# Altium PCB PCB4.PcbDoc
Units mm, origin at the board's own origin, x right, y up, seen from the top; angles counter-clockwise.
Board outline 200 x 100 mm, 2 copper layers (Top Layer, Bottom Layer); 133 components, 113 nets, 472 pads, 30 vias.
Unrouted connection lines stored in the file: 95.
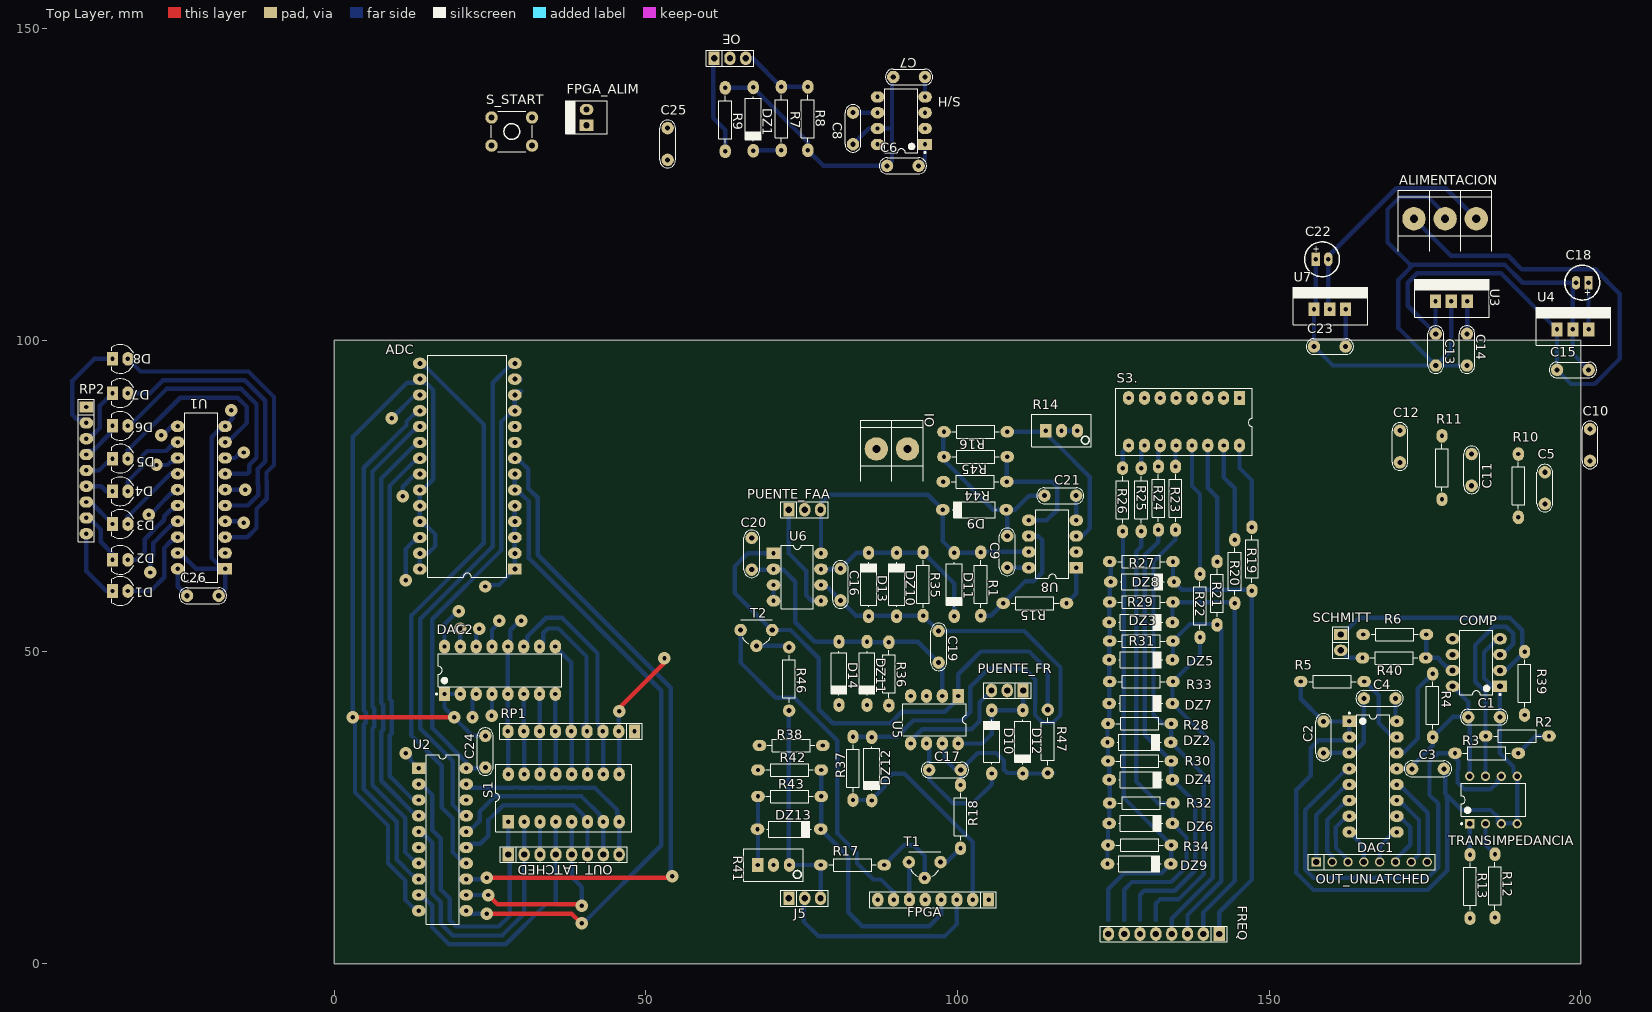
[diagram p0: Top Layer view]
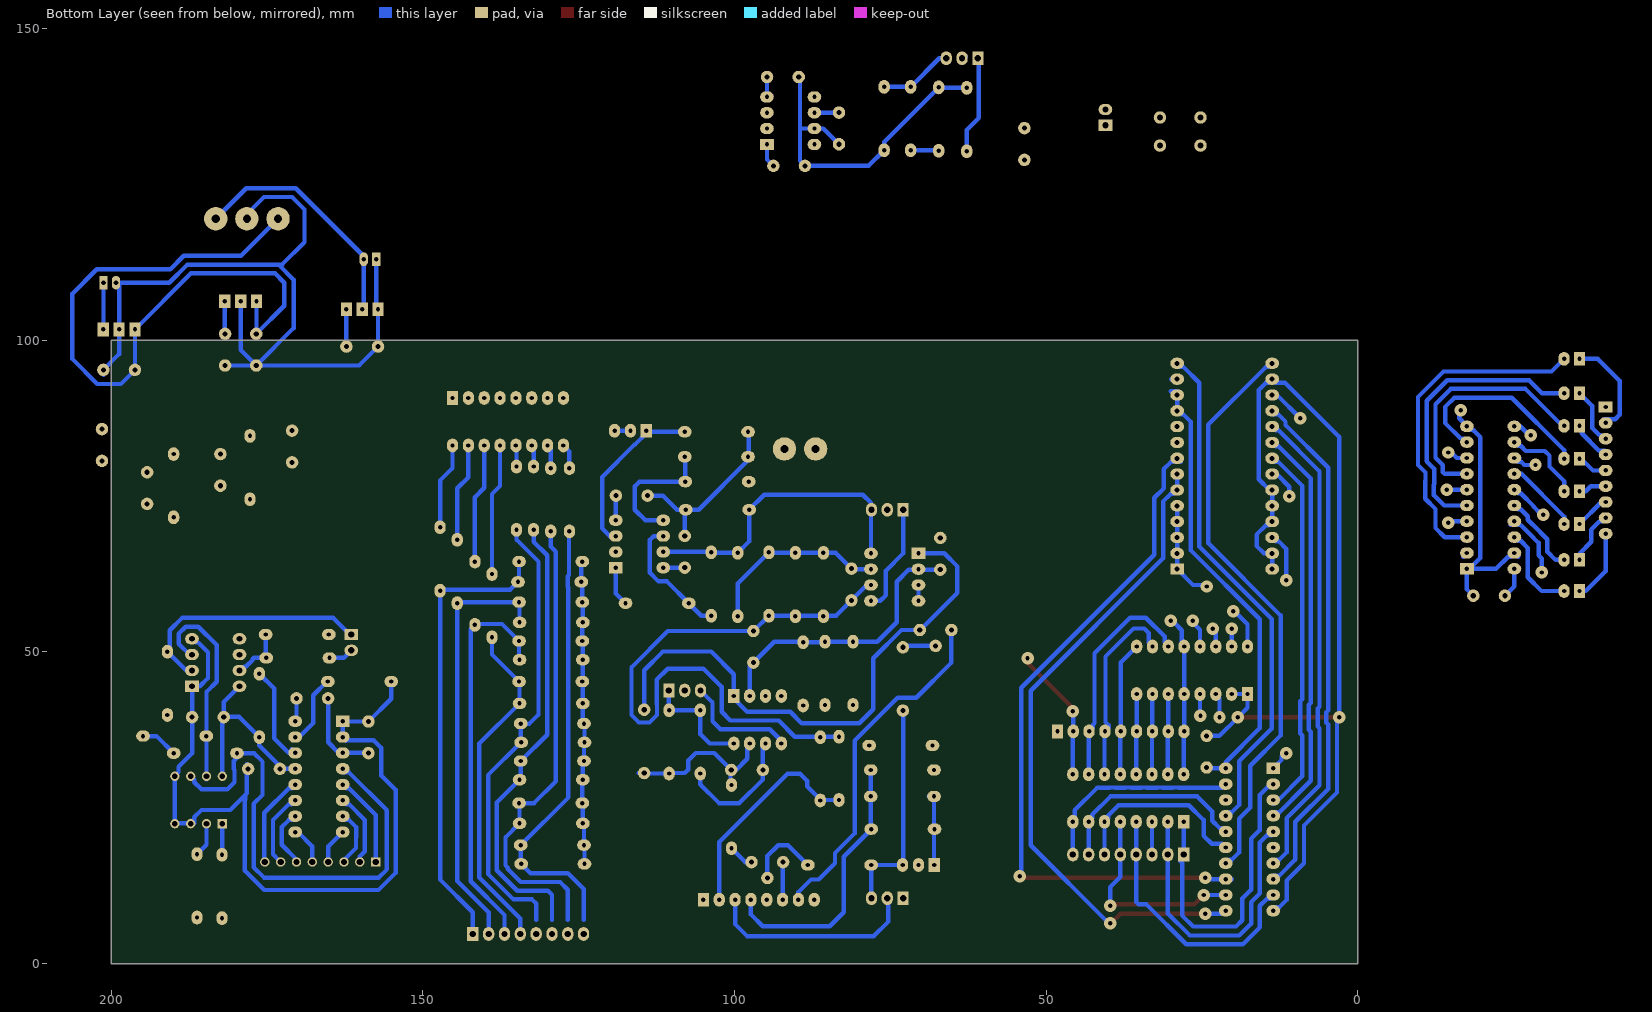
[diagram p1: Bottom Layer view, seen from below]

## Layer stack, top to bottom
Top Solder: solder mask 0.0102, Solder Resist, Dk 3.5
Top Layer: signal copper 0.0356
Dielectric 1: dielectric 0.32, FR-4, Dk 4.8
Bottom Layer: signal copper 0.0356
Bottom Solder: solder mask 0.0102, Solder Resist, Dk 3.5

## Board outline
0,0 0,100 200,100 200,0 0,0

## Design rules (kind name [scope] priority, off if disabled: settings)
Clearance [All] p1: gap=0.7 ignorepadtopadclearanceinfootprint=FALSE except(0: Arc-Hole Track-Hole SMDPad-Hole THPad-Hole Via-Hole Fill-Hole Poly-Hole Region-Hole Text-Hole)
PolygonConnect [All] p1: connectstyle=Relief reliefconductorwidth=0.254 reliefentries=4 polygonreliefangle="90 Angle" airgapwidth=0.254
RoutingVias [All] p1: holewidth=0.7 width=2 viastyle="Through Hole" minholewidth=0.7 minwidth=2 maxholewidth=0.7 maxwidth=2
SolderMaskExpansion [All] p1: expansion=0.102
Width [All] p1: maxlimit=0.7 minlimit=0.7 preferedwidth=0.7
30 further rules are at their usual default settings.

## Components (designator, comment, footprint, x,y, rotation, side; value= is the part's Value field where it differs from the comment)
ADC "ADC0808CCN" DIP28 28.99,63.29 r180 top
ALIMENTACION "BORNERA 3" BORNERA3 178.25,119.5 r270 top
C1 "100n" CAP200 184.5,39.55 r0 top
C2 "100n" CAP200 158.75,36.3 r270 top
C3 "100n" CAP200 175.5,31.25 r180 top
C4 "10n" CAP200 167.75,42.55 r0 top
C5 "100n" CAP200 194.25,76.29 r270 top
C6 "100n" CAP200 91.25,128 r180 top
C7 "100n" CAP200 92.25,142.25 r180 top
C8 "10n" CAP200 83.25,134 r270 top
C9 "CAP" CAP200 108,66.07 r90 top
C10 "10n" CAP200 201.5,83.21 r90 top
C11 "100n" CAP200 182.5,79.21 r270 top
C12 "100n" CAP200 171,82.96 r270 top
C13 "330n" CAP200 176.75,98.5 r270 top
C14 "100n" CAP200 181.75,98.5 r270 top
C15 "100n" CAP200 198.75,95.25 r0 top
C16 "100n" CAP200 81.25,60.82 r270 top
C17 "100n" CAP200 98,31.07 r0 top
C18 "10u" CAP100RP 200.25,109.25 r180 top
C19 "100n" CAP200 97,50.82 r90 top
C20 "100n" CAP200 67,65.75 r90 top
C21 "CAP" CAP200 116.5,75.07 r180 top
C22 "2.2u" CAP100RP 158.5,113 r0 top
C23 "1u" CAP200 159.75,99 r180 top
C24 "100n" CAP200 24.25,34 r90 top
C25 "CAP" CAP200 53.5,131.5 r270 top
C26 "CAP" CAP200 -21.06,59.02 r0 top
COMP "LM311N" N08E#1 183.25,48.3 r180 top
D1 "LED" LED3 -34.31,59.77 r180 top
D2 "LED" LED3 -34.31,64.77 r180 top
D3 "LED" LED3 -34.31,70.52 r180 top
D4 "LED" LED3 -34.31,75.77 r180 top
D5 "LED" LED3 -34.31,81.02 r180 top
D6 "LED" LED3 -34.31,86.27 r180 top
D7 "LED" LED3 -34.31,91.52 r180 top
D8 "LED" LED3 -34.31,97.02 r180 top
D9 "DIODO" DO41 102.75,72.82 r180 top
D10 "DIODO" DO41 105.5,35.57 r90 top
D11 "DIODO" DO41 99.5,60.82 r270 top
D12 "DIODO" DO41 110.5,35.57 r270 top
D13 "DIODO" DO41 85.75,60.82 r90 top
D14 "DIODO" DO41 81,46.57 r270 top
DAC1 "DAC0800LCN" N16E 166.69,29.99 r0 top
DAC2 "DAC0800LCN" N16E 26.6,47.06 r90 top
DZ1 "3.3V" DO41 67.25,135.5 r270 top
DZ2 "3.6V" DO41 129.17,35.5 r0 top
DZ3 "3.6V" DO41 129.42,54.75 r0 top
DZ4 "3.6V" DO41 129.42,29.5 r0 top
DZ5 "3.6V" DO41 129.42,48.75 r0 top
DZ6 "3.6V" DO41 129.42,22.5 r0 top
DZ7 "3.6V" DO41 129.42,41.75 r0 top
DZ8 "3.6V" DO41 129.67,61.25 r0 top
DZ9 "3.6V" DO41 129.17,16 r0 top
DZ10 "5.6V" DO41 90.25,60.82 r90 top
DZ11 "5.6V" DO41 85.5,46.57 r270 top
DZ12 "3.6V" DO41 86.25,31.25 r270 top
DZ13 "3.6V" DO41 73,21.57 r0 top
FPGA "CON8" SIP8#1 105,10.25 r180 top
FPGA_ALIM "MOLEX2" MOLEX2 40.5,134.5 r90 top
FREQ "CON8" SIP8#2 142,4.75 r180 top
IO "BORNERA 2" BORNERA2 89.5,82.57 r270 top
J5 "SAR/MOD" JUMPER3 75.5,10.5 r0 top
OE "JUMPER" JUMPER3 63.5,145.25 r0 top
OUT_LATCHED "CON8" SIP8#2 27.95,17.5 r0 top
OUT_UNLATCHED "CON8" SIP8#3 157.59,16.3 r0 top
PUENTE_FAA "JUMPER" JUMPER3 75.5,72.82 r0 top
PUENTE_FR "JUMPER" JUMPER3 108,43.82 r180 top
R1 "4k7" RES400#1 103.75,55.82 r90 top
R2 "1K5" RES400#1 184.75,36.5 r0 top
R3 "1K" RES400#1 190,33.75 r180 top
R4 "5K" RES400#1 176.25,46.5 r270 top
R5 "5K" RES400#1 165.25,45.25 r180 top
R6 "1K" RES400#1 175.25,52.8 r180 top
R7 "560" RES400#1 71.75,130.5 r90 top
R8 "1K" RES400#1 76,130.5 r90 top
R9 "1K" RES400#1 62.75,140.5 r270 top
R10 "5K" RES400#1 190,81.75 r270 top
R11 "5K" RES400#1 177.75,84.66 r270 top
R12 "1K" RES400#1 186.25,17.55 r270 top
R13 "1k5" RES400#1 182.25,7.3 r90 top
R14 "10k" "PRESET V" 116.71,85.5 r0 top
R15 "4k7" RES400#1 117.5,57.82 r180 top
R16 "4k7" RES400#1 108,85.32 r180 top
R17 "2k2" RES400#1 88.25,15.82 r180 top
R18 "6k8" RES400#1 100.5,18.5 r90 top
R19 "10k" RES400#1 147.25,70 r270 top
R20 "10k" RES400#1 144.5,68 r270 top
R21 "10k" RES400#1 141.67,64.5 r270 top
R22 "10k" RES400#1 138.92,62.5 r270 top
R23 "10k" RES400#1 135,79.75 r270 top
R24 "10k" RES400#1 132.25,79.75 r270 top
R25 "10k" RES400#1 129.5,79.5 r270 top
R26 "10k" RES400#1 126.5,79.5 r270 top
R27 "22k" RES400#1 124.42,64.5 r0 top
R28 "22k" RES400#1 124.17,38.5 r0 top
R29 "22k" RES400#1 124.42,58 r0 top
R30 "22k" RES400#1 124.17,32.5 r0 top
R31 "22k" RES400#1 124.42,51.75 r0 top
R32 "22k" RES400#1 124.42,25.75 r0 top
R33 "22k" RES400#1 124.42,45.25 r0 top
R34 "22k" RES400#1 124.17,19 r0 top
R35 "10k" RES400#1 94.5,55.82 r90 top
R36 "10k" RES400#1 89,41.41 r90 top
R37 "20k" RES400#1 83.25,26.25 r90 top
R38 "10k" RES400#1 68.25,35 r0 top
R39 "TBD" RES400#1 191,39.89 r90 top
R40 "TBD" RES400#1 165,49.05 r0 top
R41 "PRESET" "PRESET V" 70.5,15.82 r0 top
R42 "10K" RES400#1 68,31.07 r0 top
R43 "20K" RES400#1 68,26.82 r0 top
R44 "4k7" RES400#1 97.75,77.32 r0 top
R45 "4k7" RES400#1 108,81.32 r180 top
R46 "2k2" RES400#2 73,50.75 r270 top
R47 "6k8" RES400#2 114.5,30.57 r90 top
RP1 "R-PACK 8+1" RESNET8+1 48.2,37.25 r180 top
RP2 "R-PACK 8+1" RESNET8+1 -39.75,89.29 r270 top
S1 "SW-DIP8" DIP-16-KEY 27.95,22.75 r0 top
S3. "SW-DIP8" DIP-16-KEY 145.25,90.75 r180 top
S/H "LF398N" N08E#2 91,135.25 r180 top
S_START "TACT SWITCH" TACTSWITCH 28.5,133.5 r90 top
SCHMITT "JUMPER" JUMPER2 161.5,51.53 r270 top
T1 "TRANSISTOR NPN" TO92 94.75,15 r0 top
T2 "TRANSISTOR NPN" TO92 67.75,52.25 r0 top
TRANSIMPEDANCIA "LM358N" N08E#3 186,26.25 r90 top
U1 "SN74LS244N" 738-03 -21.31,74.77 r90 top
U2 "MC74HC374N" 738-03 17.39,19.9 r270 top
U3 "7805" "TO-220 V" 179.25,106.25 r0 top
U4 "MC33269" "TO-220 V" 198.75,101.75 r0 top
U5 "MAX297CPA" DIP8 100.12,42.94 r270 top
U6 "MAX297CPA" DIP8 70.5,65.82 r0 top
U7 "7905" "TO-220 V" 159.75,105 r0 top
U8 "TL082ACJG" 693-02 115.25,67.32 r90 top

## Footprints (in the part's own frame and the unit in brackets; to place one, negate y for a bottom-side part, rotate by r counter-clockwise, add the part's x,y. Pads: shape width x height; smd on the part's side, far side on the other; paste and mask are expansions set on the pad)
693-02 [mm] "DIP; 8 Leads; Row Spacing 7.62 mm; Pitch 2.54 mm"
  rect 1.8x2.2 hole 0.7: 1(-3.81,-3.81)
  oval 1.8x2.2 hole 0.7: 2(-1.27,-3.81) 3(1.27,-3.81) 4(3.81,-3.81) 5(3.81,3.81) 6(1.27,3.81) 7(-1.27,3.81) 8(-3.81,3.81)
  silkscreen extent -5.5,-2.65 5.5,2.65
738-03 [mm] "DIP; 20 Leads; Row Spacing 7.62 mm; Pitch 2.54 mm"
  rect 1.8x2.2 hole 0.7: 1(-11.43,-3.81)
  oval 1.8x2.2 hole 0.7: 2(-8.89,-3.81) 3(-6.35,-3.81) 4(-3.81,-3.81) 5(-1.27,-3.81) 6(1.27,-3.81) 7(3.81,-3.81) 8(6.35,-3.81) 9(8.89,-3.81) 10(11.43,-3.81) 11(11.43,3.81) 12(8.89,3.81) 13(6.35,3.81) 14(3.81,3.81) 15(1.27,3.81) 16(-1.27,3.81) 17(-3.81,3.81) 18(-6.35,3.81) 19(-8.89,3.81) 20(-11.43,3.81)
  silkscreen extent -13.6,-2.65 13.6,2.65
BORNERA2 [mm] "Bornera con Tornillos 5mm separación"
  round 3.75 hole 1.3: 1(0,2.5) 2(0,-2.5)
  silkscreen extent -4.6,-5 5.2,5, body extent -3.76,-4.89 3.94,5.61, height 10
BORNERA3 [mm] "Bornera con Tornillos 5mm separación"
  round 3.75 hole 1.3: 1(0,5) 2(0,0) 3(0,-5)
  silkscreen extent -4.6,-7.5 5.2,7.5, body extent -3.76,-7.39 3.94,8.11, height 10.05
CAP100RP [mm] "Body diameter 5mm"
  rect 1.3x2.2 hole 0.762: 1(-1,0)
  oval 1.3x2.2 hole 0.762: 2(1,0)
  silkscreen extent -2.79,-2.79 2.79,2.79, body extent -2.53,-2.51 2.53,2.54, height 11.53
CAP200 [mm]
  round 2 hole 0.813: 1(-2.54,0) 2(2.54,0)
  silkscreen extent -3.81,-1.27 3.81,1.27, body extent -2.79,-1.17 2.79,1.12, height 6.24
DIP8 [mm]
  rect 2.2x1.8 hole 0.7: 1(0,0)
  oval 2.2x1.8 hole 0.7: 2(0,-2.54) 3(0,-5.08) 4(0,-7.62) 5(7.62,-7.62) 6(7.62,-5.08) 7(7.62,-2.54) 8(7.62,0)
  silkscreen extent 1.27,-8.89 6.35,1.27, body extent -0.06,-9.21 7.7,1.59, height 4.5
DIP28 [mm]
  rect 2.2x1.8 hole 0.813: 1(0,0)
  oval 2.2x1.8 hole 0.813: 2(0,-2.54) 3(0,-5.08) 4(0,-7.62) 5(0,-10.16) 6(0,-12.7) 7(0,-15.24) 8(0,-17.78) 9(0,-20.32) 10(0,-22.86) 11(0,-25.4) 12(0,-27.94) 13(0,-30.48) 14(0,-33.02) 15(15.24,-33.02) 16(15.24,-30.48) 17(15.24,-27.94) 18(15.24,-25.4) 19(15.24,-22.86) 20(15.24,-20.32) 21(15.24,-17.78) 22(15.24,-15.24) 23(15.24,-12.7) 24(15.24,-10.16) 25(15.24,-7.62) 26(15.24,-5.08) 27(15.24,-2.54) 28(15.24,0)
  silkscreen extent 1.27,-34.29 13.97,1.27, body extent -0.19,-34.54 15.43,1.47, height 4.66
DIP-16-KEY [mm] "DIP; 16 Leads; Row Spacing 7.62 mm; Pitch 2.54 mm"
  rect 1.8x2.2 hole 0.7: 1(0,0)
  oval 1.8x2.2 hole 0.7: 2(2.54,0) 3(5.08,0) 4(7.62,0) 5(10.16,0) 6(12.7,0) 7(15.24,0) 8(17.78,0) 9(17.78,7.62) 10(15.24,7.62) 11(12.7,7.62) 12(10.16,7.62) 13(7.62,7.62) 14(5.08,7.62) 15(2.54,7.62) 16(0,7.62)
  silkscreen extent -2.05,-1.59 19.83,9.2
DO41 [mm]
  oval 2.2x1.8 hole 0.7: 1(-5.08,0) 2(5.08,0)
  silkscreen extent -3.56,-1.27 3.56,1.27, body extent -5.46,-1.19 5.46,1.37, height 2.03
JUMPER2 [mm]
  rect 1.8x2.2 hole 1.016: 1(-1.27,0)
  oval 1.8x2.2 hole 1.016: 2(1.27,0)
  silkscreen extent -2.54,-1.27 2.54,1.27, body extent -2.46,-1.27 2.54,1.27, height 9.5
JUMPER3 [mm]
  rect 1.8x2.2 hole 1.016: 1(-2.54,0)
  oval 1.8x2.2 hole 1.016: 2(0,0) 3(2.54,0)
  silkscreen extent -3.81,-1.27 3.81,1.27, body extent -3.81,-1.3 3.81,1.27, height 16.15
LED3 [mm]
  oval 1.8x2.2 hole 0.7: 1(-1.219,0)
  rect 1.7x2.2 hole 0.7: 2(1.245,0)
  silkscreen extent -2.13,-2.3 1.36,2.3, body extent -1.65,-1.63 1.65,1.66, height 0.49
MOLEX2 [mm]
  rect 1.8x2.2 hole 1.016: 1(0,0)
  oval 1.8x2.2 hole 1.016: 2(2.54,0)
  silkscreen extent -1.4,-3.3 3.94,3.3, body extent -1.27,-3.17 3.81,3.18, height 10.74
N08E#1 [mm] "DIP, 8-Leads, Row Spacing 7.62mm, Pitch 2.54mm, Body 9.91x6.35mm"
  rect 2.2x1.8 hole 0.9: 1(-3.81,3.81)
  oval 2.2x1.8 hole 0.9: 2(-3.81,1.27) 3(-3.81,-1.27) 4(-3.81,-3.81) 5(3.81,-3.81) 6(3.81,-1.27) 7(3.81,1.27) 8(3.81,3.81)
  silkscreen extent -3.94,-5.15 2.65,5.23, body extent -3.6,-5.15 3.6,5.15, height 5.34
N08E#2 [mm] "DIP, 8-Leads, Row Spacing 7.62mm, Pitch 2.54mm, Body 9.91x6.35mm"
  rect 2.2x1.8 hole 0.7: 1(-3.81,3.81)
  oval 2.2x1.8 hole 0.7: 2(-3.81,1.27) 3(-3.81,-1.27) 4(-3.81,-3.81) 5(3.81,-3.81) 6(3.81,-1.27) 7(3.81,1.27) 8(3.81,3.81)
  silkscreen extent -3.94,-5.15 2.65,5.23, body extent -3.6,-5.15 3.6,5.15, height 5.34
N08E#3 [mm] "DIP, 8-Leads, Row Spacing 7.62mm, Pitch 2.54mm, Body 9.91x6.35mm"
  rect 1.5x1.5 hole 0.9: 1(-3.81,3.81)
  round 1.5 hole 0.9: 2(-3.81,1.27) 3(-3.81,-1.27) 4(-3.81,-3.81) 5(3.81,-3.81) 6(3.81,-1.27) 7(3.81,1.27) 8(3.81,3.81)
  silkscreen extent -3.93,-5.15 2.65,5.23, body extent -3.6,-5.15 3.6,5.15, height 5.34
N16E [mm] "DIP, 16-Leads, Row Spacing 7.62mm, Pitch 2.54mm, Body 19.3x6.35mm"
  rect 2.2x1.8 hole 0.7: 1(-3.81,8.89)
  oval 2.2x1.8 hole 0.7: 2(-3.81,6.35) 3(-3.81,3.81) 4(-3.81,1.27) 5(-3.81,-1.27) 6(-3.81,-3.81) 7(-3.81,-6.35) 8(-3.81,-8.89) 9(3.81,-8.89) 10(3.81,-6.35) 11(3.81,-3.81) 12(3.81,-1.27) 13(3.81,1.27) 14(3.81,3.81) 15(3.81,6.35) 16(3.81,8.89)
  silkscreen extent -3.93,-9.9 2.65,10.31, body extent -3.3,-9.9 3.3,9.9, height 4.32
"PRESET V" [mm]
  rect 1.8x2.2 hole 0.7: 1(-2.54,0)
  oval 1.8x2.2 hole 0.7: 2(0,0) 3(2.54,0)
  silkscreen extent -4.76,-2.6 4.76,2.6, body extent -4.7,-2.42 4.83,2.42, height 11.55
RES400#1 [mm]
  oval 2.2x1.8 hole 0.7: 1(0,0) 2(10.16,0)
  silkscreen extent 1.27,-1.02 8.89,1.02, body extent -0.3,-1.14 10.46,1.17, height 2.43
RES400#2 [mm]
  round 2 hole 0.813: 1(0,0) 2(10.16,0)
  silkscreen extent 1.27,-1.02 8.89,1.02, body extent -0.3,-1.14 10.46,1.17, height 2.43
RESNET8+1 [mm]
  rect 1.8x2.2 hole 0.7: 1(0,0)
  oval 1.8x2.2 hole 0.7: 2(2.54,0) 3(5.08,0) 4(7.62,0) 5(10.16,0) 6(12.7,0) 7(15.24,0) 8(17.78,0) 9(20.32,0)
  silkscreen extent -1.27,-1.27 21.59,1.27, body extent -1.09,-0.64 21.41,0.62, height 5.3
SIP8#1 [mm]
  rect 1.8x2.2 hole 0.7: 1(0,0)
  oval 1.8x2.2 hole 0.7: 2(2.54,0) 3(5.08,0) 4(7.62,0) 5(10.16,0) 6(12.7,0) 7(15.24,0) 8(17.78,0)
  silkscreen extent -1.27,-1.27 19.05,1.27, body extent -1.27,-1.27 19.05,1.27, height 8.38
SIP8#2 [mm]
  rect 1.8x2.2 hole 1.016: 1(0,0)
  oval 1.8x2.2 hole 1.016: 2(2.54,0) 3(5.08,0) 4(7.62,0) 5(10.16,0) 6(12.7,0) 7(15.24,0) 8(17.78,0)
  silkscreen extent -1.27,-1.27 19.05,1.27, body extent -1.27,-1.27 19.05,1.27, height 8.38
SIP8#3 [mm]
  rect 1.5x1.5 hole 1.016: 1(0,0)
  round 1.5 hole 1.016: 2(2.54,0) 3(5.08,0) 4(7.62,0) 5(10.16,0) 6(12.7,0) 7(15.24,0) 8(17.78,0)
  silkscreen extent -1.27,-1.27 19.05,1.27, body extent -1.27,-1.27 19.05,1.27, height 8.38
TACTSWITCH [mm]
  round 2 hole 1.016: 1(-2.25,-3.25) 2(-2.25,3.25) 3(2.25,-3.25) 4(2.25,3.25)
  silkscreen extent -3.25,-3.25 3.25,3.25, body extent -3.05,-3.95 3.15,3.95, height 7
TO92 [mm]
  round 2 hole 0.813: 1(0,-1.27) 2(2.54,1.27) 3(-2.54,1.27)
  silkscreen extent -2.54,-1 2.54,2.92, body extent -2.79,-1.55 2.79,2.79, height 8
"TO-220 V" [mm]
  rect 1.8x2.2 hole 0.7: 1(-2.54,0) 2(0,0) 3(2.54,0)
  silkscreen extent -5.9,-2.54 6.1,3.54, body extent -5,-2 5,3, height 18

## Part data
ADC: "28 pin 8-bit Microprocessor Compatible A/D Converters With 8-Channel Multiplexer 13 per tube"
C1 C2 C3 C4 C5 C6 C7 C8 C10 C11 C12 C13 C14 C15 C16 C17 C19 C20 C23 C24: library part CAP
C18 C22: library part CAPPOL
COMP: "Voltage Comparator, 8-pin MDIP"
DAC1 DAC2: "8-Bit D/A Converter, 16-pin MDIP"
DZ1 DZ2 DZ3 DZ4 DZ5 DZ6 DZ7 DZ8 DZ9 DZ10 DZ11 DZ12 DZ13: library part "DIODO ZENER"
J5 OE PUENTE_FAA PUENTE_FR: library part JUMPER3
R1 R2 R3 R4 R5 R6 R7 R8 R9 R10 R11 R12 R13 R15 R16 R17 R18 R19 R20 R21 R22 R23 R24 R25 R26 R27 R28 R29 R30 R31 R32 R33 R34 R35 R36 R37 R38 R39 R40 R42 R43 R44 R45 R46 R47: library part RES
R14: library part PRESET
S1 S3.: "4009 Series DIP Switch, Raised actuator"
S/H: "Monolithic Sample and Hold Circuits, 8-pin MDIP"
TRANSIMPEDANCIA: "Low Power Dual Operational Amplifier, 8-pin MDIP"
U1: "Octal Buffer/Line Driver with 3-State Outputs"
U2: "Octal 3-State Non-Inverting D-Type Flip-Flop"
U3 U4: library part 78XX, "REGULDOR POSITIVO"
U5 U6: "Active Filter Single SW-CAP Low Pass 8th Order 50kHz 8-Pin PDIP N"
U7: library part 79XX, "REGULADOR NEGATIVO"
U8: "JFET-Input Operational Amplifier"

## Via types
v1: diameter 2, hole 0.711, Top Layer to Bottom Layer, 30 vias

## Nets (pads, with @x,y where several pads share a name; then routed paths per layer and width w, separated by ;. In a path a pad name is that pad's centre, name@x,y a point inside that pad or via, vN(x,y) a via of type N, cw(c..) or ccw(c..) an arc to the next point about the centre after c; other vN are vias at no path point)
B0: DAC2.5 DAC2.12 RP1.2 RP1.9 S1.9 S1.16 U1.2 U1.17 | length 58.3
  Top Layer w0.7: v1(45.75,40.5) 45.75,41 53,48.25 v1(53,49)
  Bottom Layer w0.7: v1(-29.5,62.75) -29.5,65 -29,65.5 -29,67.5 -27.5,69 -27.498,69 -26.128,70.37 -25.71,70.37 U1.17 U1.17@-24.53,70.37 ; U1.2 U1.2@-16.91,65.29 ; RP1.9 27.88,43.24 DAC2.5 DAC2.12 28.25,51.25 28.25,53.49 v1@29.51,54.75 ; S1.16 RP1.9@27.95,37.18 ; RP1.2 v1@45.66,40.34 ; S1.9 RP1.2@45.73,37.18
  other v1: 30,55
B1: DAC2.11 RP1.3 S1.10 U1.15 | length 42.2
  Bottom Layer w0.7: v1@-29.25,72.25 -28.25,73.25 -28.25,73.328 -26.128,75.45 -25.71,75.45 U1.15 ; DAC2.11 31,51.46 31,52.48 34.02,55.5 36.54,55.5 42.25,49.79 42.25,38.538 42.53,38.258 42.53,37.84 RP1.3 ; S1.10 RP1.3@43.19,37.18
  other v1: -29.75,72
B2: DAC2.10 RP1.4 S1.11 U1.13 | length 35
  Bottom Layer w0.7: v1@-28,80 -26.716,80 -26.22,80.496 -26.22,80.53 -25.71,80.53 U1.13 U1.13@-25.88,81.12 ; DAC2.10@32.95,50.95 DAC2.10 33.54,51.46 33.54,53.04 34.27,53.77 35.98,53.77 40.5,49.25 40.5,38.768 39.99,38.258 39.99,37.84 RP1.4 ; S1.11 RP1.4@40.65,37.18
  other v1: -28.5,80
B3: DAC2.9 RP1.5 S1.12 U1.11 | length 23.8
  Bottom Layer w0.7: v1@-27,85.25 -26.05,86.2 U1.11 ; DAC2.9 38.04,48.32 RP1.5 ; S1.12 RP1.5@38.11,37.18
  other v1: -27.75,84.75
B4: DAC2.8 RP1.6 S1.13 U1.8 | length 15.3
  Bottom Layer w0.7: U1.8 -15.88,81.12 v1@-15.25,81.75 ; DAC2.8 35.49,37.26 RP1.6 ; S1.13 RP1.6@35.57,37.18
  other v1: -14.5,82
B5: DAC2.7 RP1.7 S1.14 U1.6 | length 15
  Bottom Layer w0.7: U1.6 -15.29,76.04 ; DAC2.7 32.96,43.24 RP1.7 ; S1.14 RP1.7@33.03,37.18
  other v1: -14.25,76
B6: DAC2.6 RP1.8 S1.15 U1.4 | length 14.9
  Bottom Layer w0.7: U1.4 v1@-15.46,70.96 ; DAC2.6 30.41,37.26 RP1.8 ; S1.15 RP1.8@30.49,37.18
  other v1: -14.5,70.75
CLK_9FS: FPGA.6 T1.3 | length 5.6
  Bottom Layer w0.7: FPGA.6 T1.3@92.3,15.89
CLK_DAC: ADC.10 R18.1 T1.2 | length 4.1
  Bottom Layer w0.7: T1.2 98.27,16.27 R18.1
CLK_FILTRO: FPGA.7 T2.3 | length 55.9
  Bottom Layer w0.7: T2.3 65.21,48.29 70.86,42.64 73.849,42.64 80.75,35.739 80.75,20.88 83.9,17.73 83.9,16.1 86.5,13.5 87.75,13.5 89.76,11.49 FPGA.7
FPGA_OE: DZ1.2 R7.1 R38.1 | length 4.4
  Bottom Layer w0.7: DZ1.2@67.33,130.5 R7.1
FR_IN: D10.2 D12.1 PUENTE_FR.1 R13.2 TRANSIMPEDANCIA.1 U5.8 | length 23
  Bottom Layer w0.7: U5.8 104,35.32 105.5,36.82 D10.2 D12.1 110.54,40.69 PUENTE_FR.1 ; R13.2@182.19,17.52 TRANSIMPEDANCIA.1@182.19,22.49
GND: ADC.1 ADC.2 ADC.3 ADC.4 ADC.5 ADC.13 ADC.16 ADC.23 ADC.24 ADC.25 ADC.27 ADC.28 ALIMENTACION.2 C1.2 C2.1 C3.1 C5.2 C6.2 C7.2 C8.2 C9.2 C11.1 C12.1 C13.2 C14.2 C15.2 C16.2 C17.1 C18.2 C19.2 C20.2 C21.2 C22.1 C23.2 C24.2 C25.1 C26.2 COMP.1 COMP.4 D9.1 D10.1 D13.1 D14.2 DAC1.1 DAC1.2 DAC2.1 DAC2.2 DZ1.1 DZ2.1 DZ3.1 DZ4.1 DZ5.1 DZ6.1 DZ7.1 DZ8.1 DZ9.1 DZ10.1 DZ11.2 DZ12.1 DZ13.1 FPGA_ALIM.2 J5.1 R5.2 R8.1 R9.1 R11.1 R16.2 R27.1 R28.1 R29.1 R30.1 R31.1 R32.1 R33.1 R34.1 R35.1 R36.1 R37.2 R41.1 R43.1 R45.2 RP1.1 RP2.1 S/H.7 TRANSIMPEDANCIA.3 TRANSIMPEDANCIA.4 TRANSIMPEDANCIA.5 U1.1 U1.10 U1.19 U2.10 U3.2 U4.2 U5.6 U6.6 U7.1 | length 757.2
  Top Layer w0.7: v1(3,39.5) 18.75,39.5 19,39.75 v1(19.25,39.5)
  Bottom Layer w0.7: U1.19@-25.71,65.29 U1.19 -24.53,65.29 -24.112,65.29 -22.162,63.34 U1.1 ; C26.2 -17.5,60.04 U1.1 ; v1(-16.5,88.75) -16.25,88.5 -16.25,87.5 -17.5,86.25 U1.10 -18.09,85.61 -18.618,85.61 -18.618,85.5 -19.65,84.468 -19.65,65.072 -18.508,63.93 -17.53,63.93 -17.5,63.9 U1.1 ; ADC.28 ADC.27 15.08,65.83 16.25,67 16.25,68.828 14.758,70.32 14.34,70.32 ADC.25 ADC.24 ADC.23 14.168,75.99 15.9,77.722 15.9,92.038 14.758,93.18 14.34,93.18 ADC.16 13.16,93.18 11.68,93.18 3,84.5 v1(3,39.5) 3.46,39.04 3.35,38.931 3.35,27.44 8.63,22.16 8.63,16.102 11.43,13.302 11.43,10.202 12.572,9.06 12.99,9.06 U2.10 U2.10@13.79,8.26 ; DAC2.2 DAC2.1 17.71,41.04 v1(19.25,39.5) 22.21,36.54 C24.2 ; v1@24.25,60.75 26.45,60.75 ADC.1 ADC.2 ADC.3 ADC.4 ADC.5 ; ADC.13@28.99,93.22 ADC.13 ADC.13@29.968,93.77 ; R9.1 DZ1.1@67.17,140.5 ; DZ1.1 76,131.83 R8.1 78.5,128 C6.2 89.5,128.79 89.5,133.75 ; R41.1@68,15.86 R43.1 R43.1@68.82,26.82 ; U6.6@78,60.74 U6.6 78.79,60.74 C16.2 83.71,55.82 R35.1 96.96,53.36 C19.2 110.71,53.36 116.55,47.52 116.55,39.881 115.349,38.68 113.651,38.68 112.45,39.881 112.45,41.579 112.49,41.619 112.49,45.56 110.73,47.32 105,47.32 102.07,44.39 102.07,40.39 100.68,39 92.93,39 90.34,36.41 R37.2 ; C8.2 85.77,133.98 S/H.7 89.27,133.98 89.5,133.75 ; C7.2@89.5,142.04 89.5,133.75 ; U5.6 95.46,34.9 C17.1 95.46,29.54 99.25,25.75 102.5,25.75 105.5,28.75 D10.1 D10.1@106.05,30.49 ; R16.2 97.75,85.23 97.75,80.82 105.75,72.82 D9.1 109.25,72.82 111.5,75.07 C21.2 ; C9.2 D9.1@108,72.65 ; DZ9.1@123.92,15.83 DZ9.1 124.09,18.92 R34.1 124.17,22.33 DZ6.1 124.34,25.67 R32.1 124.42,29.42 DZ4.1 124.34,32.33 R30.1 124.17,35.42 DZ2.1 124.09,38.42 R28.1 ; R28.1@124.34,38.67 DZ7.1@124.34,42.25 ; R33.1@124.42,45.75 R33.1@124.34,45.67 ; R27.1@124.59,64.33 DZ8.1 124.42,61.08 R29.1 124.34,57.92 DZ3.1 124.42,54.67 R31.1 124.34,51.67 DZ5.1 R33.1@124.34,45.67 ; DZ7.1@124.63,41.96 DZ7.1@124.34,42.25 ; R5.2 155.09,42.5 C2.1 162.84,38.84 DAC1.1 DAC1.2 162.29,35.75 162.29,35.81 157.901,35.81 156.7,34.609 156.7,30.16 154.42,27.88 154.39,27.91 154.39,14.535 157.125,11.8 175.48,11.8 178.57,14.89 178.57,26.21 178.5,26.28 178.5,27.05 ; U7.1 C23.2 160.25,95.96 C13.2 ; U7.1@157.5,105.29 C22.1 ; C3.1@178.25,32 178.25,27.3 178.5,27.05 ; ALIMENTACION.2 178.25,120.25 175.5,123 171,123 169,121 169,115.75 172.6,112.15 173.17,112.15 ; U3.2 179.25,98.46 C13.2 ; C14.2 C13.2 ; COMP.4 186.47,51.52 186.052,51.52 184.5,49.968 184.5,45.8 185.81,44.49 COMP.1 187.04,44.47 C1.2 187.04,33.752 189.22,31.572 189.22,30.7 189.81,30.11 189.81,22.49 187.27,22.49 187.27,22.908 186.852,22.49 186.68,22.49 186.68,23.498 185.538,24.64 180.91,24.64 178.5,27.05 ; C15.2@201.25,94.5 201.29,94.54 C15.2 198.75,97.79 U4.2 198.75,108.75 C18.2 190.69,109.25 187.79,112.15 173.17,112.15 ; DZ7.1@124.34,42.25 R33.1@124.34,45.67 ; 173.17,112.15 170.75,109.73 170.75,101.96 C13.2
  other v1: 24.25,60.5
LATCH_OE: OE.3 R7.2 R8.2 U2.1 | length 14.3
  Bottom Layer w0.7: v1@12.25,33.25 12.25,32.66 U2.1 ; OE.3 67.16,145.25 R7.2 R8.2
  other v1: 11.5,33.75
NetADC_8: ADC.8 U2.13 | length 113.3
  Top Layer w0.7: v1(24.5,13.75) 54.5,13.75 v1(54.25,14)
  Bottom Layer w0.7: U2.13@20.2,13.55 U2.13 v1@24.2,13.55 ; ADC.8@28.4,80.48 ADC.8 29.58,80.48 29.998,80.48 31.14,79.338 31.14,76.238 32.65,74.728 32.65,65.6 54,44.25 54,14.75 54.25,14.5 v1(54.25,14) v1@54.5,13.75
NetADC_14: ADC.14 U2.17 | length 82.8
  Bottom Layer w0.7: U2.17 20.61,24.3 20.192,24.3 19.05,25.442 19.05,32.45 13.8,37.7 13.8,55.28 25.44,66.92 25.44,93.178 27.982,95.72 28.99,95.72 ADC.14
NetADC_15: ADC.15 U2.14 | length 93.4
  Bottom Layer w0.7: ADC.15 14.34,95.72 14.758,95.72 24,86.478 24,67.46 12.4,55.86 12.4,36.6 17.25,31.75 17.25,25.05 19.05,23.25 19.05,17.822 20.192,16.68 20.61,16.68 U2.14
NetADC_17: ADC.17 U2.18 | length 6
  Bottom Layer w0.7: v1(9.25,87.5) 12.98,91.23 ADC.17
NetADC_18: ADC.18 U2.8 | length 83.9
  Bottom Layer w0.7: U2.8 13.58,14.14 12.572,14.14 10.03,16.682 10.03,22.74 4.75,28.02 4.75,38.351 5.05,38.651 5.05,40.349 4.75,40.649 4.75,79.548 11.6,86.398 11.6,86.958 12.742,88.1 13.58,88.1 13.58,88.52 ADC.18
NetADC_19: ADC.19 U2.7 | length 77
  Bottom Layer w0.7: U2.7 12.99,16.68 12.572,16.68 11.43,17.822 11.43,23.32 6.15,28.6 6.15,37.771 6.45,38.071 6.45,40.929 6.15,41.229 6.15,78.968 12.742,85.56 13.16,85.56 ADC.19
NetADC_20: ADC.20 U2.4 | length 68
  Bottom Layer w0.7: U2.4@12.96,24.3 U2.4@13,24.26 ; U2.4 13.55,23.71 U2.4@13.5,23.76 ; ADC.20 13.16,83.02 12.742,83.02 7.55,77.828 7.55,41.809 7.85,41.509 7.85,37.491 7.55,37.191 7.55,29.322 13.5,23.372 U2.4@13.5,23.76 ; U2.4@13,24.26 13.5,24.26 U2.4@13.5,23.76 ; U2.4@13,24.26 U2.4@13.5,23.76
NetADC_21: ADC.21 U2.3 | length 60.3
  Bottom Layer w0.7: U2.3@13.58,25.66 U2.3 12.75,26.25 8.95,30.05 8.95,36.611 9.25,36.911 9.25,42.089 8.95,42.389 8.95,76.688 12.742,80.48 13.16,80.48 ADC.21
NetC4_2: C4.2 DAC1.16 | length 3.8
  Bottom Layer w0.7: C4.2 170.29,39.09 DAC1.16
NetC8_1: C8.1 S/H.6 | length 3.9
  Bottom Layer w0.7: C8.1 83.27,136.52 S/H.6
NetC10_1: C10.1 DAC2.16 | length 6.1
  Bottom Layer w0.7: DAC2.16 17.71,54.46 v1@19.5,56.25
  other v1: 20,56.5
NetCOMP_2: COMP.2 R39.2 SCHMITT.1 | length 39.9
  Bottom Layer w0.7: SCHMITT.1 161.75,52.8 164.41,55.46 188.648,55.46 190.61,53.498 190.61,50.44 R39.2 187.98,47.03 COMP.2 COMP.2@187.08,47.05
NetCOMP_3: COMP.3 R2.1 TRANSIMPEDANCIA.7 | length 34.5
  Bottom Layer w0.7: TRANSIMPEDANCIA.7@184.73,29.57 184.73,30.11 184.73,33.8 184.73,43.59 183.1,45.22 183.1,51.108 186.052,54.06 188.068,54.06 189.21,52.918 189.21,51.302 187.478,49.57 COMP.3
NetD1_1: D1.1 U1.18 | length 14.3
  Bottom Layer w0.7: D1.1 -29.48,59.77 -27.27,61.98 -27.27,66.688 -26.128,67.83 -25.71,67.83 U1.18
NetD1_2: D1.2 RP2.9 | length 11.5
  Bottom Layer w0.7: RP2.9@-39.75,68.95 -39.75,62.96 -36.56,59.77 D1.2
NetD2_1: D2.1 U1.16 | length 13.1
  Bottom Layer w0.7: D2.1 -31.73,64.77 -30.4,66.1 -30.4,68.08 -28.08,70.4 -28.078,70.4 -27.27,71.208 -27.27,71.768 -26.128,72.91 -25.71,72.91 U1.16
NetD2_2: D2.2 RP2.8 | length 8.8
  Bottom Layer w0.7: RP2.8@-39.75,71.49 -39.78,71.49 -39.21,70.92 -38.742,70.92 -37.455,69.632 -37.455,67.665 -35.555,65.765 D2.2
NetD3_1: D3.1 U1.14 | length 12
  Bottom Layer w0.7: D3.1 -33.091,71.739 -26.25,78.58 U1.14
NetD3_2: D3.2 RP2.7 | length 5.6
  Bottom Layer w0.7: RP2.7@-39.75,74.03 -39.065,74.03 D3.2
NetD4_1: D4.1 U1.12 | length 13.7
  Bottom Layer w0.7: D4.1 -33.091,77.409 -30.75,79.75 -30.75,81.5 -30,82.25 -26.948,82.25 -26.128,83.07 -25.71,83.07 U1.12 U1.12@-25.59,83.66
NetD4_2: D4.2 RP2.6 | length 4.5
  Bottom Layer w0.7: RP2.6@-39.75,76.57 -37.36,76.57 -36.56,75.77 D4.2
NetD5_1: D5.1 U1.9 | length 33
  Bottom Layer w0.7: D5.1@-32.48,81.02 D5.1 -33.091,82.409 -24.7,90.8 -15.49,90.8 -14,89.31 -14,86.742 -16.492,84.25 -16.91,84.25 U1.9 U1.9@-17.07,83.66
NetD5_2: D5.2 RP2.5 | length 5
  Bottom Layer w0.7: RP2.5@-39.75,79.11 -37.72,79.11 -35.81,81.02 D5.2
NetD6_1: D6.1 U1.7 | length 39.8
  Bottom Layer w0.7: D6.1 D6.1@-32.821,86.27 ; D6.1@-33.071,86.02 D6.1@-32.821,86.27 ; U1.7 -13.92,78.58 -13.65,78.85 -13.65,79.949 ; -13.651,79.95 -12.45,81.151 -12.45,89.74 -14.91,92.2 -26.891,92.2 D6.1@-32.821,86.27
NetD6_2: D6.2 RP2.4 | length 7
  Bottom Layer w0.7: RP2.4@-40.175,81.65 -39.565,82.26 -38.742,82.26 -35.92,85.082 -35.92,85.905 D6.2
NetD7_1: D7.1 U1.5 | length 45.9
  Bottom Layer w0.7: D7.1 -29.551,91.52 -27.471,93.6 -14.33,93.6 -11.05,90.32 -11.05,80.571 -12.25,79.371 -12.25,76.899 -12.2,76.849 -12.2,75.151 -13.851,73.5 U1.5
NetD7_2: D7.2 RP2.3 | length 9.2
  Bottom Layer w0.7: RP2.3@-39.615,84.19 -39.005,84.8 -38.742,84.8 -37.6,85.942 -37.6,87.955 -37.6,89.475 D7.2
NetD8_1: D8.1 U1.3 | length 54.4
  Bottom Layer w0.7: D8.1 -31.071,95 -13.75,95 -9.65,90.9 -9.65,79.991 -10.85,78.791 -10.85,77.479 -10.8,77.429 -10.8,74.571 -12.45,72.921 -12.45,69.901 -13.931,68.42 U1.3 U1.3@-17.5,69.01
NetD8_2: D8.2 RP2.2 | length 16.7
  Bottom Layer w0.7: RP2.2@-39.6,86.73 -39.6,87.34 -41.285,87.34 -42,88.055 -42,93.5 -38.48,97.02 D8.2
NetD9_2: D9.2 D11.1 PUENTE_FAA.3 R1.2 U6.8 U8.7 | length 48.8
  Bottom Layer w0.7: U6.8 78.12,73.94 79.42,75.24 95.25,75.24 D9.2 97.67,67.73 D11.1 103.67,65.9 R1.2 ; R1.2@103.82,66.05 U8.7
NetDAC1_4: DAC1.4 R3.2 TRANSIMPEDANCIA.6 | length 77.6
  Bottom Layer w0.7: DAC1.4 162.88,30.67 161.872,30.67 155.79,24.588 155.79,15.115 157.105,13.8 175.5,13.8 177.17,15.47 177.17,25.63 175.75,27.05 175.75,32.41 177.09,33.75 179.09,33.75 180.34,32.5 180.34,31.218 180.24,31.118 180.24,29.102 181.382,27.96 185.538,27.96 186.68,29.102 186.68,29.52 TRANSIMPEDANCIA.6@187.27,30.11
NetDAC1_5: DAC1.5 OUT_UNLATCHED.1 | length 14.9
  Bottom Layer w0.7: OUT_UNLATCHED.1 157.59,23.848 161.872,28.13 162.29,28.13 DAC1.5
NetDAC1_6: DAC1.6 OUT_UNLATCHED.2 | length 11.9
  Bottom Layer w0.7: OUT_UNLATCHED.2 160.13,17.19 159.33,17.99 159.33,23.048 161.872,25.59 162.29,25.59 DAC1.6
NetDAC1_7: DAC1.7 OUT_UNLATCHED.3 | length 9.3
  Bottom Layer w0.7: OUT_UNLATCHED.3 162.67,16.63 160.75,18.55 160.75,20.252 160.73,20.272 160.73,21.908 161.872,23.05 162.29,23.05 DAC1.7
NetDAC1_8: DAC1.8 OUT_UNLATCHED.4 | length 5.8
  Bottom Layer w0.7: DAC1.8 165.18,18.8 165.18,16.33 OUT_UNLATCHED.4
NetDAC1_9: DAC1.9 OUT_UNLATCHED.5 | length 6.2
  Bottom Layer w0.7: OUT_UNLATCHED.5 167.75,18.8 170.05,21.1 DAC1.9
NetDAC1_10: DAC1.10 OUT_UNLATCHED.6 | length 9.8
  Bottom Layer w0.7: OUT_UNLATCHED.6 170.29,16.69 172.65,19.05 172.65,21.908 171.508,23.05 170.5,23.05 DAC1.10
NetDAC1_11: DAC1.11 OUT_UNLATCHED.7 | length 12.1
  Bottom Layer w0.7: DAC1.11 171.09,25.59 171.508,25.59 174.05,23.048 174.05,17.526 173.57,17.046 173.57,17.04 OUT_UNLATCHED.7
NetDAC1_12: DAC1.12 OUT_UNLATCHED.8 | length 14.7
  Bottom Layer w0.7: DAC1.12 171.09,28.13 171.508,28.13 175.45,24.188 175.45,16.38 OUT_UNLATCHED.8
NetDAC1_14: DAC1.14 R4.1 | length 16.5
  Bottom Layer w0.7: DAC1.14@171.09,34.39 DAC1.14 171.55,33.8 173.875,36.125 173.875,44.125 R4.1
NetDAC1_15: DAC1.15 R5.1 | length 11.6
  Bottom Layer w0.7: R5.1 165.409,45.25 167.59,43.069 167.59,38.59 169.84,36.34 DAC1.15
NetDAC2_4: DAC2.4 R12.1 TRANSIMPEDANCIA.2 | length 8.7
  Bottom Layer w0.7: v1@25.33,40.08 DAC2.4 ; TRANSIMPEDANCIA.2@184.73,22.49 184.73,19.07 R12.1
  other v1: 25.25,39.75
NetDAC2_14: DAC2.14 R10.2 | length 2.9
  Bottom Layer w0.7: DAC2.14 v1@22.79,53.79
  other v1: 23.25,53.75
NetDAC2_15: DAC2.15 R11.2 | length 2.4
  Bottom Layer w0.7: DAC2.15 v1@20.25,53.25
  other v1: 20.25,53.75
NetDZ2_2: DZ2.2 FREQ.5 R23.2 R28.2 | length 73.1
  Bottom Layer w0.7: 131.84,7 131.84,9.64 132.5,10.3 135.468,10.3 139.55,14.382 139.55,30.238 134.288,35.5 DZ2.2 ; DZ2.2@134.33,35.58 R28.2 132.92,38.5 131.47,39.95 131.47,64.5 135,68.03 R23.2
NetDZ3_2: DZ3.2 FREQ.2 R20.2 R29.2 | length 68.3
  Bottom Layer w0.7: DZ3.2 134.5,57.92 R29.2@134.58,57.92 ; R29.2 R20.2@144.5,58 ; FREQ.2 139.46,8.21 144.5,13.25 R20.2
NetDZ4_2: DZ4.2 FREQ.6 R24.2 R30.2 | length 73.4
  Bottom Layer w0.7: 129.3,7 129.3,11.05 129.95,11.7 134.888,11.7 138.15,14.962 138.15,25.85 DZ4.2 134.33,29.67 R30.2 134.292,32.5 130.07,36.722 130.07,65.5 132.25,67.68 R24.2
NetDZ5_2: DZ5.2 FREQ.3 R21.2 R31.2 | length 63.3
  Bottom Layer w0.7: DZ5.2@134.58,48.83 R31.2 137.32,54.49 141.52,54.49 R21.2 142.35,53.66 142.35,13.223 136.92,7.793 FREQ.3
NetDZ6_2: DZ6.2 FREQ.7 R25.2 R32.2 | length 75.2
  Bottom Layer w0.7: 126.76,7 126.76,11.86 128,13.1 134.308,13.1 136.4,15.192 136.4,15.4 136.75,15.75 136.75,20.25 DZ6.2 R32.2@134.5,25.67 ; R25.2 129.5,66.91 128.67,66.08 128.67,29.25 132.17,25.75 R32.2
NetDZ7_2: DZ7.2 FREQ.4 R22.2 R33.2 | length 54.7
  Bottom Layer w0.7: FREQ.4 134.38,7.233 140.95,13.803 140.95,35.3 DZ7.2 R33.2@134.5,45.17 ; R33.2 138.92,49.59 R22.2
NetDZ8_2: DZ8.2 FREQ.1 R19.2 R27.2 | length 72.8
  Bottom Layer w0.7: R27.2 134.58,61.42 DZ8.2 136,60 R19.2@146.41,60 ; FREQ.1 142,8.25 147.25,13.5 R19.2
NetDZ9_2: DZ9.2 FREQ.8 R26.2 R34.2 | length 73.3
  Bottom Layer w0.7: 124.22,7 124.22,11.97 126.75,14.5 132.75,14.5 DZ9.2 ; R26.2 126.57,69.34 126.57,62.298 126.74,62.128 126.74,60.442 126.67,60.372 126.67,26.66 R34.2 DZ9.2@134.33,16.08
NetDZ12_2: DZ12.2 FPGA.2 R37.1 R38.2 | length 35.2
  Bottom Layer w0.7: R37.1 86.17,26.25 88.35,28.43 88.35,29.308 89.492,30.45 91.508,30.45 102.46,19.498 FPGA.2
NetDZ13_2: DZ13.2 FPGA.4 R42.2 R43.2 | length 43.5
  Bottom Layer w0.7: DZ13.2 82.5,17.15 82.5,8.25 84.75,6 95.5,6 97.38,7.88 FPGA.4 ; DZ13.2@78.16,21.65 R43.2 R42.2
NetFPGA_3: FPGA.3 J5.2 | length 34.1
  Bottom Layer w0.7: J5.2 75.32,10.32 75.32,6.75 77.66,4.41 98,4.41 99.92,6.33 FPGA.3
NetFPGA_8: FPGA.8 R41.2
NetIO_1: IO.1 R44.1
NetIO_2: IO.2 PUENTE_FR.2
NetOUT_LATCHED_1: OUT_LATCHED.1 S1.1 U2.2 | length 50.4
  Bottom Layer w0.7: U2.2 13.998,28.79 15.73,27.058 15.73,21.418 17.13,20.018 17.13,11.838 18.53,10.438 18.53,6.97 19.55,5.95 26.42,5.95 28.2,7.73 28.2,16.152 28.54,16.492 28.54,16.91 OUT_LATCHED.1 S1.1
NetOUT_LATCHED_2: OUT_LATCHED.2 S1.2 U2.5 | length 47
  Bottom Layer w0.7: U2.5 13.85,20.9 13.85,20.58 14.588,20.58 15.73,19.438 15.73,11.258 17.13,9.858 17.13,6.39 19.02,4.5 26.95,4.5 30.49,8.04 OUT_LATCHED.2 S1.2
NetOUT_LATCHED_3: OUT_LATCHED.3 S1.3 U2.6 | length 5.3
  Bottom Layer w0.7: OUT_LATCHED.3 S1.3
NetOUT_LATCHED_4: OUT_LATCHED.4 S1.4 U2.9 | length 43
  Bottom Layer w0.7: U2.9 14.17,10.42 14.588,10.42 15.73,9.278 15.73,5.81 18.44,3.1 27.53,3.1 33.93,9.5 35.2,9.5 35.57,9.87 OUT_LATCHED.4 S1.4
NetOUT_LATCHED_5: OUT_LATCHED.5 S1.5 U2.12 | length 32.9
  Top Layer w0.7: v1(24.75,11) 26.25,9.5 39.5,9.5 v1(39.75,9.25)
  Bottom Layer w0.7: U2.12 v1@24.24,11.01 ; S1.5 OUT_LATCHED.5 38.11,13.89 39.75,12.25 v1(39.75,9.25)
NetOUT_LATCHED_6: OUT_LATCHED.6 S1.6 U2.15 | length 30.3
  Bottom Layer w0.7: U2.15 21.79,19.22 23.45,19.22 24.75,20.52 24.75,23.05 27.12,25.42 38.398,25.42 40.06,23.758 40.06,23.34 S1.6 OUT_LATCHED.6
NetOUT_LATCHED_7: OUT_LATCHED.7 S1.7 U2.16 | length 32.5
  Bottom Layer w0.7: U2.16 21.79,21.76 22.208,21.76 23.35,22.902 23.35,24.4 25.77,26.82 39.68,26.82 42.6,23.9 42.6,23.34 S1.7 OUT_LATCHED.7
NetOUT_LATCHED_8: OUT_LATCHED.8 S1.8 U2.19 | length 33.3
  Bottom Layer w0.7: U2.19 21.77,28.22 28.758,28.22 28.788,28.25 29.652,28.25 29.682,28.22 31.298,28.22 31.328,28.25 32.192,28.25 32.222,28.22 33.838,28.22 33.868,28.25 34.732,28.25 34.762,28.22 36.378,28.22 36.408,28.25 37.272,28.25 37.302,28.22 38.918,28.22 38.948,28.25 39.812,28.25 39.842,28.22 41.458,28.22 41.488,28.25 41.79,28.25 45.45,24.59 45.45,23.03 S1.8 OUT_LATCHED.8
NetPUENTE_FAA_1: PUENTE_FAA.1 U6.5 | length 17.6
  Bottom Layer w0.7: PUENTE_FAA.1 72.96,65.79 75.75,63 75.75,59.07 76.62,58.2 U6.5
NetPUENTE_FR_3: PUENTE_FR.3 U5.5 | length 18.5
  Bottom Layer w0.7: U5.5 92.5,35.738 94.362,37.6 102.28,37.6 103.55,38.87 103.55,41.91 PUENTE_FR.3
NetR1_1: R1.1 R15.2 U8.6 | length 20.4
  Bottom Layer w0.7: R1.1 105.34,55.82 R15.2 110.84,61.32 112.208,61.32 113.59,62.702 113.59,67.98 112.98,68.59 U8.6
NetR2_2: R2.2 R3.1 | length 6.3
  Bottom Layer w0.7: R3.1@190.25,33.75 R3.1 192.75,36.5 R2.2
NetR12_2: R12.2 R13.1
NetR14_1: R14.1 R16.1 U8.3 | length 27.6
  Bottom Layer w0.7: R16.1 113.99,85.32 R14.1 114.17,85.082 115.902,83.35 115.96,83.35 ; 115.96,83.36 121.25,78.07 121.25,69.82 120.02,68.59 U8.3
NetR15_1: R15.1 U8.1 U8.2 | length 6.3
  Bottom Layer w0.7: R15.1 119.06,59.38 U8.1
NetR17_1: R17.1 T1.1 | length 12.1
  Bottom Layer w0.7: R17.1 91.43,19 93,19 94.75,17.25 T1.1
NetR19_1: R19.1 S3..16 | length 14
  Bottom Layer w0.7: S3..16 145.25,79.5 147.25,77.5 R19.1
NetR20_1: R20.1 S3..15 | length 15.9
  Bottom Layer w0.7: S3..15 142.71,78.04 144.5,76.25 R20.1
NetR21_1: R21.1 S3..14 | length 19.3
  Bottom Layer w0.7: S3..14 140.17,76.33 141.67,74.83 R21.1
NetR22_1: R22.1 S3..13 | length 21.2
  Bottom Layer w0.7: S3..13 137.63,76.62 138.92,75.33 R22.1
NetR23_1: R23.1 S3..12 | length 3.3
  Bottom Layer w0.7: R23.1 S3..12@135,83.04
NetR24_1: R24.1 S3..11 | length 3.5
  Bottom Layer w0.7: R24.1 132.25,82.83 S3..11
NetR25_1: R25.1 S3..10 | length 3.8
  Bottom Layer w0.7: R25.1 129.5,82.62 S3..10
NetR26_1: R26.1 S3..9 | length 4
  Bottom Layer w0.7: R26.1 126.5,82.16 S3..9
NetR40_1: R40.1 SCHMITT.2 | length 4
  Bottom Layer w0.7: SCHMITT.2 162.71,49.05 R40.1
NetR44_2: R44.2 R45.1 U8.5 | length 21.3
  Bottom Layer w0.7: R45.1@107.91,81.23 R44.2 115.25,77.32 116.01,76.56 116.01,72.83 114.31,71.13 U8.5
NetR46_1: R46.1 T2.1 | length 5.3
  Bottom Layer w0.7: T2.1 72.77,50.98 R46.1
NetR47_2: R47.2 T2.2 U5.1 U6.1 | length 89.7
  Bottom Layer w0.7: T2.2@70.26,53.49 64.25,59.5 64.25,63.71 66.36,65.82 U6.1 ; T2.2 73.23,53.52 77.75,49 77.75,40.82 80,38.57 89.25,38.57 91.08,40.4 97.998,40.4 100.12,42.522 U5.1 100.12,46.44 103.75,50.07 111.5,50.07 114.5,47.07 R47.2
NetU5_3: U5.3 U5.4
NetU6_3: U6.3 U6.4 | length 2.5
  Bottom Layer w0.7: U6.4 U6.3
OE_ADC: ADC.9 OE.1 R9.2 | length 15.9
  Bottom Layer w0.7: OE.1 60.8,145.25 60.8,135.7 62.75,133.75 R9.2
OUT_COMP: COMP.7 R6.1 R40.2 R42.1 | length 8
  Bottom Layer w0.7: R6.1 175.25,49.14 R40.2 177.128,49.05 177.29,48.888 177.29,48.762 178.432,47.62 COMP.7@178.75,47.62
SH_CONTROL: FPGA.5 S/H.8
SH_IN: PUENTE_FAA.2 S/H.3
SH_OUT: ADC.26 R39.1 S/H.5 | length 8.2
  Bottom Layer w0.7: v1(11.5,61.5) 11.5,66.538 12.742,67.78 13.16,67.78 ADC.26 ADC.26@13.58,68.37
START/EOC: ADC.6 ADC.7 ADC.22 S_START.1 U2.11 | length 111.9
  Top Layer w0.7: v1(24.5,8) 38.101,8 39.601,6.5 v1(39.75,6.5)
  Bottom Layer w0.7: v1(11,75) 11,76.5 13.03,78.53 ADC.22 ; U2.11@21.23,8.5 U2.11 21.67,8 v1(24.5,8) ; ADC.7 ADC.6 29.58,75.4 29.998,75.4 31.25,74.148 31.25,65.02 52.5,43.77 52.5,19 40,6.5 v1(39.75,6.5)
VCC_3.3: C18.1 J5.3 R6.2 R17.2 R41.3 R46.2 S3..1 S3..2 S3..3 S3..4 S3..5 S3..6 S3..7 S3..8 U4.3 | length 42.9
  Bottom Layer w0.7: R46.2@72.96,40.86 72.96,15.9 R41.3 R17.2 J5.3@78.09,10.55 ; U4.3@201.25,101.79 C18.1
VCC_5: ADC.11 ADC.12 C14.1 C16.1 C17.2 C24.1 C25.2 C26.1 D11.2 D12.2 D13.2 DZ10.2 FPGA_ALIM.1 OE.2 R18.2 R35.2 R47.1 S_START.3 U1.20 U2.20 U3.3 U5.7 U6.7 | length 140
  Bottom Layer w0.7: U1.20 -25.12,60.54 C26.1 ; C24.1@23.92,31.33 U2.20 21.2,32.3 15.76,37.74 15.76,42.99 15.75,43 15.75,55.25 26.84,66.34 26.84,86.958 27.982,88.1 28.4,88.1 ADC.11 ADC.12 28.99,91.82 29.998,91.82 ; OE.2@62.91,145.5 63.25,145.5 OE.2 ; U6.7 C16.1@81.25,63.28 ; C16.1 83.79,65.9 D13.2 DZ10.2 94.42,65.9 R35.2 99.5,60.98 D11.2@99.5,55.99 ; U5.7 97.96,34.94 97.96,32.86 99.75,31.07 C17.2 ; D11.2@99.25,55.74 D11.2@99.5,55.99 ; D11.2 D11.2@99.5,55.99 ; R18.2@100.66,28.5 100.66,30.95 C17.2 ; R47.1@115.419,30.57 R47.1 114.42,30.49 D12.2 110.42,30.57 108,30.57 107.45,31.12 107.45,32.58 106.25,33.78 103.25,33.78 C17.2 ; C14.1@181.79,101.08 U3.3
VCC_10: ALIMENTACION.3 C1.1 C3.2 C5.1 C7.1 C9.1 C11.2 C13.1 C15.1 COMP.8 DAC1.13 DAC2.13 R4.2 R10.1 S/H.4 TRANSIMPEDANCIA.8 U3.1 U4.1 U8.8 | length 152.9
  Bottom Layer w0.7: DAC2.13 25.33,53.58 v1@26,54.25 ; C7.1 94.79,139.08 S/H.4 ; C9.1 U8.8@111.42,63.53 ; DAC1.13 172.95,31.26 C3.2@172.96,31.27 ; C3.2 C3.2@172.96,31.27 ; ALIMENTACION.3 179.2,113.55 188.37,113.55 190.52,111.4 202.335,111.4 206.25,107.485 206.25,97 202.25,93 198.46,93 C15.1 U4.1 187.21,110.75 173.75,110.75 172.25,109.25 172.25,105.54 C13.1@176.71,101.08 ; U3.1 C13.1@176.71,101.08 ; C13.1 C13.1@176.71,101.08 ; COMP.8 181.96,41.97 C1.1 ; TRANSIMPEDANCIA.8@182.19,30.11 182.19,39.32 C1.1 ; C3.2@172.96,31.27 172.96,31.69 176.25,34.98 R4.2 179.5,39.59 181.92,39.59 C1.1
  other v1: 26.5,55
VEE_5: C19.1 C20.1 C23.1 D14.1 DZ11.1 R14.2 R14.3 R36.2 U5.2 U6.2 U7.3 | length 54.2
  Bottom Layer w0.7: C20.1 72.04,63.21 74,61.25 74,54.75 77.1,51.65 D14.1 DZ11.1 85.58,51.57 R36.2 89.08,51.65 93.63,51.65 C19.1 97.58,47.7 U5.2 ; R14.2 R14.3 ; C23.1 U7.3
VEE_10: ALIMENTACION.1 C2.2 C4.1 C6.1 C10.2 C12.2 C21.1 C22.2 DAC1.3 DAC2.3 S/H.1 U7.2 U8.4 | length 64.5
  Bottom Layer w0.7: v1(22.2,39.551) 22.2,42.66 DAC2.3 ; C6.1 94.81,129.02 S/H.1 ; U8.4 C21.1@119.06,75.05 ; C2.2 158.79,33.8 DAC1.3 163.5,33.8 165.21,35.51 C4.1 ; U7.2@159.5,105.25 C22.2 159.5,113.48 170.42,124.4 178.35,124.4 ALIMENTACION.1
pads on no net: COMP.5 COMP.6 FPGA.1 S/H.2 S_START.2 S_START.4

## Text inside footprints (layer, text, board x,y; h text height)
C18: Top Overlay "+" at 201.698,108.082 h1.02 r180
C22: Top Overlay "+" at 157.052,114.168 h1.02